# Altium PCB USB-RS485-unit.PcbDoc
Units mm, origin at the board's own origin, x right, y up, seen from the top; angles counter-clockwise.
Board outline 53 x 30 mm, 2 copper layers (Top Layer, Bottom Layer), stack 0.991 mm thick; 21 components, 15 nets, 96 pads, 14 vias.
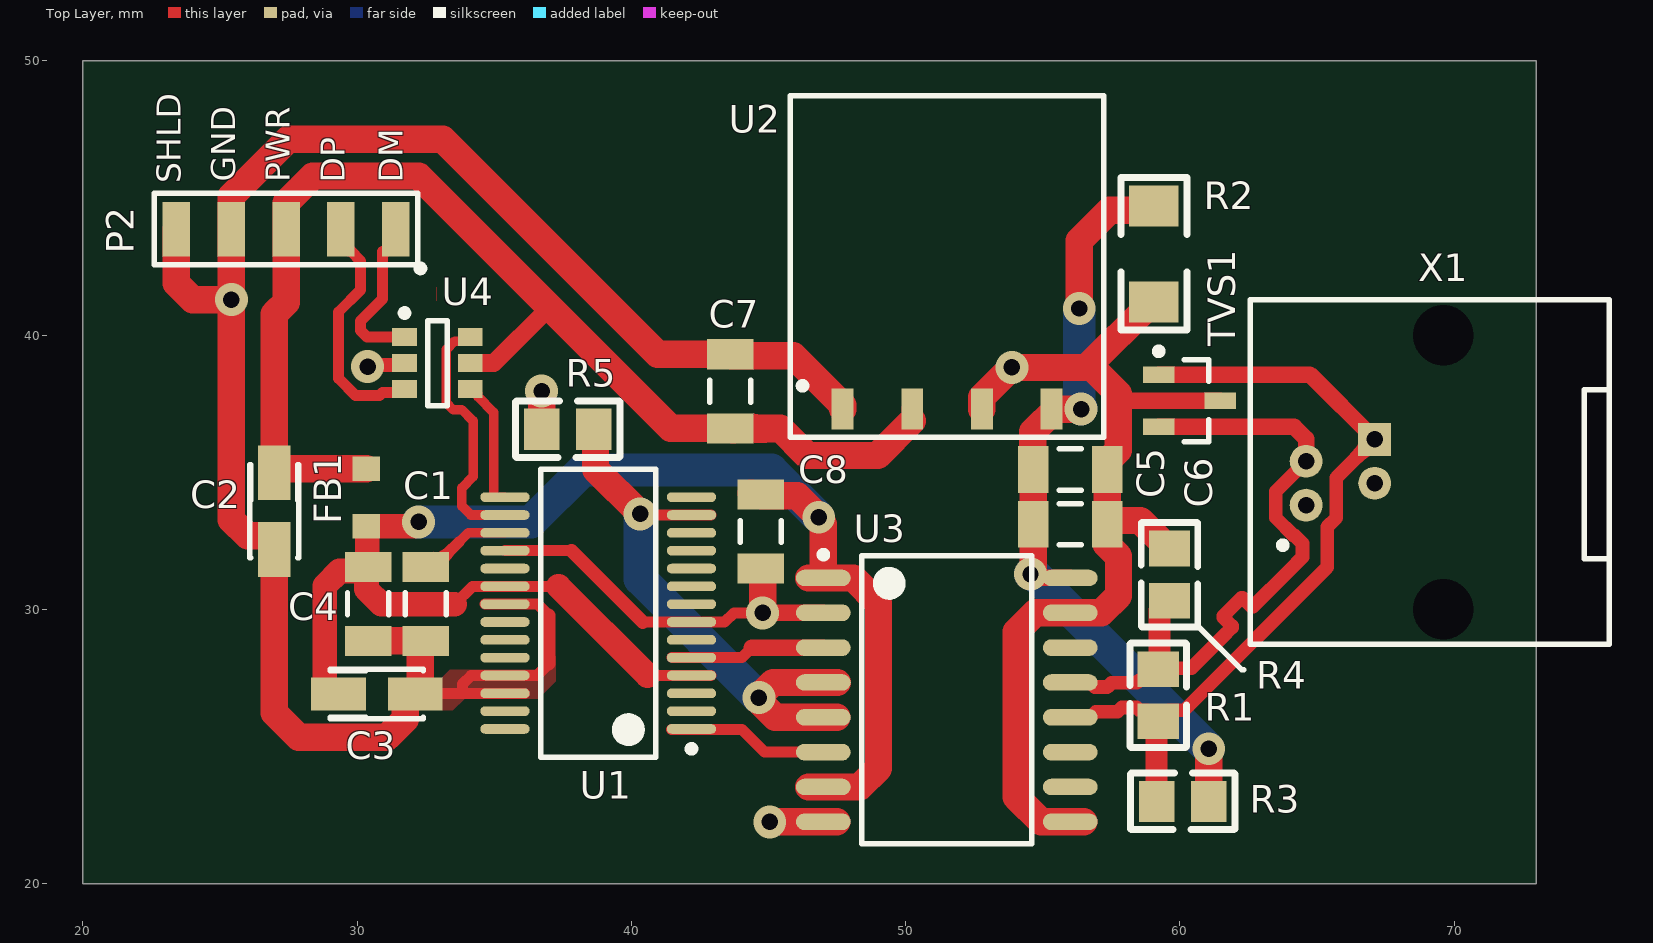
[diagram p0: Top Layer view]
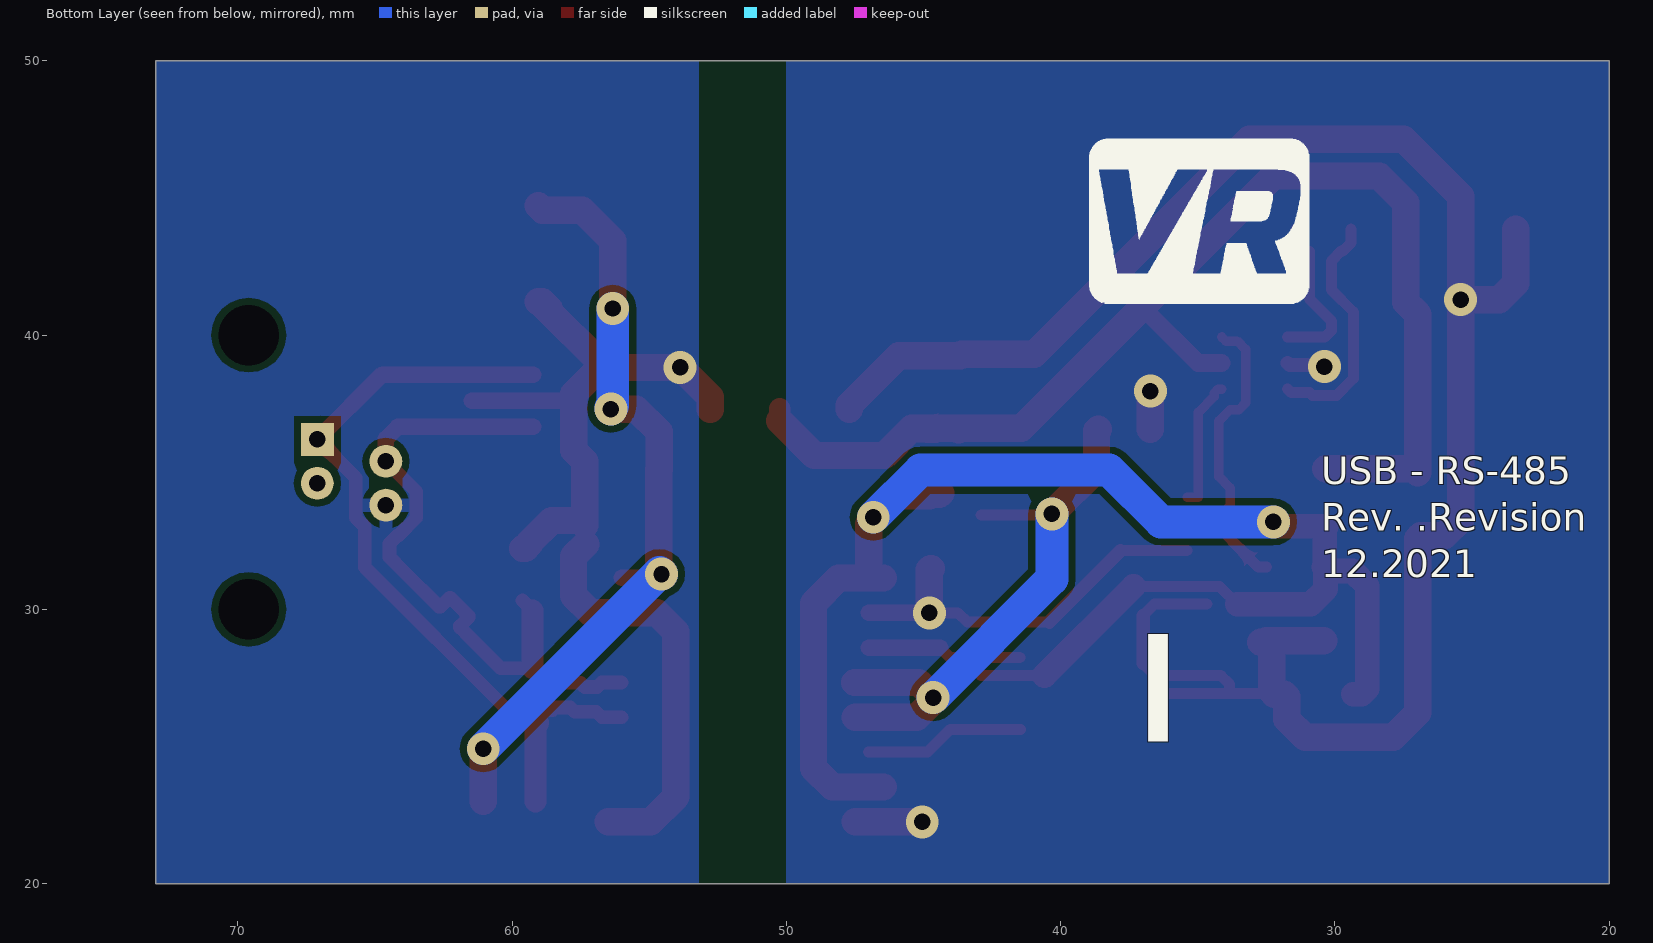
[diagram p1: Bottom Layer view, seen from below]
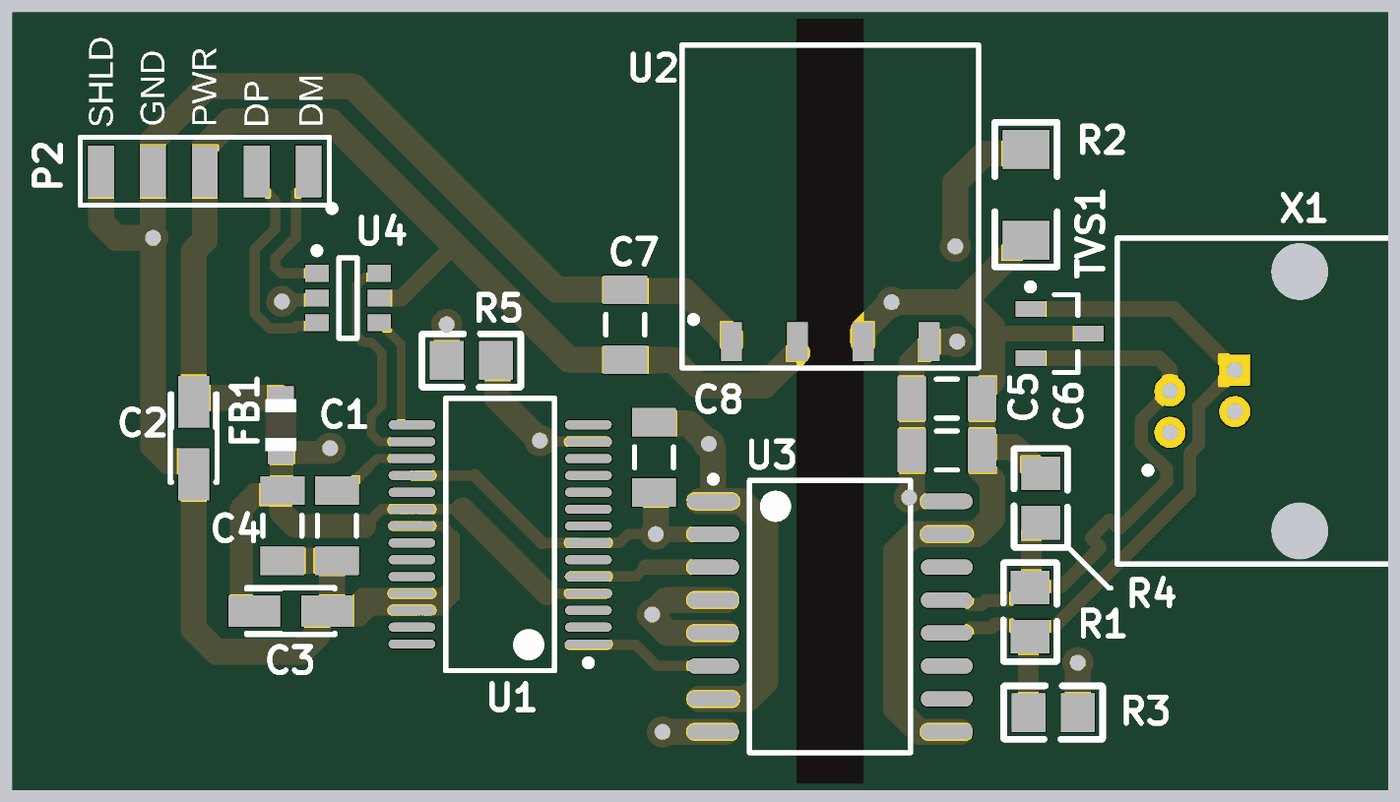
[diagram p2: 3D render of the assembled board from above, using the file's embedded part models]

## Layer stack, top to bottom
Top Solder: solder mask 0.0102, Solder Resist, Dk 3.5
Top Layer: signal copper 0.0356
Dielectric 1: dielectric 0.92, FR-4, Dk 4.8
Bottom Layer: signal copper 0.0356
Bottom Solder: solder mask 0.0102, Solder Resist, Dk 3.5

## Board outline
20,20 20,50 73,50 73,20

## Design rules (kind name [scope] priority, off if disabled: settings)
BoardOutlineClearance [(ObjectKind = 'Component') and not (Name = 'X1')] p1: gap=0.254 ignorepadtopadclearanceinfootprint=FALSE except(0: Arc-SplitContinuation Track-SplitContinuation SMDPad-SplitContinuation THPad-SplitContinuation Via-SplitContinuation Fill-SplitContinuation Poly-SplitContinuation Region-SplitContinuation Text-SplitContinuation)
Clearance Clearance-JLCPCB [All] p1 off: gap=0.254 ignorepadtopadclearanceinfootprint=TRUE except(0: Arc-Hole SMDPad-Hole THPad-Hole Via-Hole Fill-Hole Poly-Hole Region-Hole Text-Hole; 0.127: SMDPad-SMDPad; 0.2: Arc-Arc Arc-Track Arc-SMDPad Track-Track Track-SMDPad; 0.33: Track-Hole)
Clearance Clearance-3class [All] p2: gap=0.25 ignorepadtopadclearanceinfootprint=TRUE
ComponentClearance [All] p1: gap=0.254 collisioncheckmode=3 verticalgap=0.254 showdistances=TRUE
DiffPairsRouting [All] p1: maxlimit=1 minlimit=0.4 mostfreqgap=0.4 toplayer_minwidth=0.2 toplayer_maxwidth=1 toplayer_prefwidth=0.5 bottomlayer_minwidth=0.2 bottomlayer_maxwidth=1 bottomlayer_prefwidth=0.5 maxuncoupledlength=12.7
HoleSize HoleSize-Pad-JLCPCB [IsPad] p1: absolutevalues=TRUE maxlimit=6.35 minlimit=0.2 maxpercent=80.000 minpercent=20.000 // The annular ring size will be enlarged to 0.15mm in production. Plated! Tolerance is +0.13/-0.08mm
HoleSize HoleSize-PTH-JLCPCB [InDrillLayerPair('Top Layer - Bottom Layer')] p2: absolutevalues=TRUE maxlimit=6.35 minlimit=0.2 maxpercent=80.000 minpercent=20.000 // The annular ring size will be enlarged to 0.15mm in production. Plated! Tolerance is +0.13/-0.08mm
HoleSize HoleSize-Via-JLCPCB [IsVia] p3: absolutevalues=TRUE maxlimit=6.35 minlimit=0.3 maxpercent=80.000 minpercent=20.000 // Plated! Tolerance is +0.13/-0.08mm
HoleSize "HoleSize-Mechanical hole-JLCPCB" [InDrillLayerPair('Top Layer - Bottom Layer')] p4: absolutevalues=TRUE maxlimit=6.3 minlimit=0.2 maxpercent=80.000 minpercent=20.000 // Non plated! Tolerance is +-0.2mm
HoleToHoleClearance HoleToHoleClearance-JLCPCB [All] p1: gap=0.5 allowstackedmicrovias=TRUE
MatchedLengths [All] p1 off: tolerance=2 checknetsindiffpair=TRUE checkdiffpairvsdiffpair=FALSE checkxsignals=FALSE checkothers=FALSE
MinimumAnnularRing MinimumAnnularRing-2oz-JLCPCB [All] p1: minimumring=0.2 // 75um
MinimumAnnularRing MinimumAnnularRing-1oz-JLCPCB [All] p2: minimumring=0.13 // 35um
MinimumSolderMaskSliver MinimumSolderMaskSliver-JLCPCB [All] p1: minsoldermaskwidth=0.2
PlaneConnect [All] p1: pad.planeconnectstyle=Relief pad.reliefexpansion=0.6 pad.reliefentries=4 pad.reliefconductorwidth=0.5 pad.reliefairgap=0.4 via.planeconnectstyle=Direct via.reliefexpansion=0.6 via.reliefentries=4 via.reliefconductorwidth=0.5 via.reliefairgap=0.4
PolygonConnect [All] p1: thpad.connectstyle=Relief thpad.reliefconductorwidth=0.5 thpad.reliefentries=4 thpad.polygonreliefangle="90 Angle" thpad.airgapwidth=0.254 smdpad.connectstyle=Relief smdpad.reliefconductorwidth=0.5 smdpad.reliefentries=4 smdpad.polygonreliefangle="90 Angle" smdpad.airgapwidth=0.254 via.connectstyle=Direct via.reliefconductorwidth=0.5 via.reliefentries=4 via.polygonreliefangle="90 Angle" via.airgapwidth=0.254
RoomDefinition Spacer4 [All] p1: confinementstyle=ConfineOut formatcopy=TRUE lockcomponents=FALSE outline 69,22 ccw(c71,22) 71,20 ccw(c71,22) 73,22 ccw(c71,22) 71,24 ccw(c71,22)
RoomDefinition Spacer3 [All] p2: confinementstyle=ConfineOut formatcopy=TRUE lockcomponents=FALSE outline 69,48 ccw(c71,48) 71,46 ccw(c71,48) 73,48 ccw(c71,48) 71,50 ccw(c71,48)
RoomDefinition Spacer2 [All] p3: confinementstyle=ConfineOut formatcopy=TRUE lockcomponents=FALSE outline 22,46 cw(c22,48) 20,48 cw(c22,48) 22,50 cw(c22,48) 24,48 cw(c22,48)
RoomDefinition Spacer1 [All] p4: confinementstyle=ConfineOut formatcopy=TRUE lockcomponents=FALSE outline 22,20 cw(c22,22) 20,22 cw(c22,22) 22,24 cw(c22,22) 24,22 cw(c22,22)
RoomDefinition USB-RS485-unit_1 [InComponentClass('USB-RS485-unit')] p5: confinementstyle=ConfineOut formatcopy=TRUE lockcomponents=FALSE outline 20,20 73,20 73,21 20,21
RoomDefinition USB-RS485-unit [InComponentClass('USB-RS485-unit')] p6: confinementstyle=ConfineOut formatcopy=TRUE lockcomponents=FALSE outline 19.98,49 73.01,49 73.01,50 19.98,50
RoutingVias RoutingVias-JLCPCB [All] p1: holewidth=0.6 width=1.2 viastyle="Through Hole" minholewidth=0.3 minwidth=0.6 maxholewidth=6.35 maxwidth=6
SilkToSolderMaskClearance SilkToSolderMaskClearance-JLCPCB [IsPad] p1: minsilkscreentomaskgap=0.15 clearancetoexposedcopper=TRUE
SolderMaskExpansion SolderMaskExpansion-JLCPCB [All] p1: expansion=0.05
Width Width-1oz-JLCPCB [All] p1: maxlimit=3 minlimit=0.127 preferedwidth=0.5
Width Width-2oz-JLCPCB [All] p2 off: maxlimit=3 minlimit=0.2 preferedwidth=0.3
23 further rules are at their usual default settings.

## Classes and differential pairs
differential pair class 3: IN
differential pair class 2: USB1
differential pair class 1: USB
differential pair IN: +IN_P -IN_N
differential pair USB1: +USB1_P -USB1_N
differential pair USB: +USB_P -USB_N

## Components (designator, comment, footprint, x,y, rotation, side; value= is the part's Value field where it differs from the comment)
C1 "0.1uF" C1206 32.5,30.2 r90 top
C2 "0.1uF" TC3216-1206 26.98,33.58 r270 top
C3 "4.7uF" TC3216-1206 30.72,26.91 r0 top
C4 "0.1uF" C1206 30.4,30.2 r90 top
C5 "10uF" C1206 56,35.1 r180 top
C6 "0.1uF" C1206 56,33.1 r180 top
C7 "0.1uF" C1206 44.72,32.84 r90 top
C8 "4.7uF" C1206 43.61,37.95 r270 top
FB1 "40Ohm, 1.5A" "WE-CBF_0805_High Speed" 30.34,34.08 r270 top
P2 "USB pads" "USB SOLDERING PADS" 31.41,43.86 r180 top value="USB Pads"
R1 "120" RES-0805 59.21,26.87 r90 top
R2 "330" RES-1206 59.05,42.96 r90 top
R3 "560" RES-0805 60.1,23 r0 top
R4 "560" RES-0805 59.62,31.27 r270 top
R5 "10k" RES-0805 37.68,36.57 r0 top
TVS1 "CDSOT23-SM712" SOT-23B_N 60.35,37.61 r0 top
U1 "FT232RL-Reel" SSOP-28_L 38.79,29.865 r180 top locked
U2 "B0505S" "B0505S - HORIZONTAL" 47.7,37.3 r0 top locked
U3 "ADM2483" "SOL-16 WIDE" 51.5,26.7 r0 top locked
U4 "USBLC6-2" SOT23-6 32.93,38.98 r0 top
X1 "RJ11" RJ11 64.6,33.8 r90 top

## Footprints (in the part's own frame and the unit in brackets; to place one, negate y for a bottom-side part, rotate by r counter-clockwise, add the part's x,y. Pads: shape width x height; smd on the part's side, far side on the other; paste and mask are expansions set on the pad)
"B0505S - HORIZONTAL" [mm] "Isolated DC-DC"
  rect 0.8x1.5 smd: 1(0,0) 2(2.54,0) 3(5.08,0) 4(7.62,0)
  silkscreen extent -1.91,-1.02 9.53,11.43, body extent -1.94,-0.27 9.56,11.4, height 6.01
C1206 [mm] "Chip Capacitor, Body 3.2x1.6mm, IPC High Density"
  rect 1.1x1.7 smd: 1(-1.35,0) 2(1.35,0)
  silkscreen extent -0.4,-0.75 0.4,0.75, body extent -1.6,-0.8 1.6,0.82, height 1.64
RES-0805 [mm] "Chip Resistor; Body 2 x 1.3 mm (LxW typ)"
  rect 1.3x1.5 smd: 1(-0.95,0) 2(0.95,0)
  silkscreen extent -1.91,-1.03 1.91,1.03, body extent -1.24,-0.65 1.29,0.6, height 0.51
RES-1206 [mm] "Chip Resistor; Body  x mm (LxW typ)"
  rect 1.5x1.8 smd: 1(-1.75,0) 2(1.75,0)
  silkscreen extent -2.78,-1.2 2.79,1.2, body extent -1.9,-0.8 1.9,0.8, height 0.61
RJ11 [mm] "Connector"
  rect 1.2x1.2 hole 0.6: 1(2.4,-2.5)
  round 1.2 hole 0.6: 2(1.6,0) 3(0.8,-2.5) 4(0,0)
  round 0 hole 2.2 unplated: 5(-3.8,-5) 5(6.2,-5)
  silkscreen extent -5.08,-11.05 7.49,2.03, body extent -5.11,-11 7.51,2, height 14.61
"SOL-16 WIDE" [mm] "16-Pin Small Outline Integrated Circuit 1.27 mm Pitch, Wide Body"
  oval 2x0.6 smd: 1(-4.5,4.445) 2(-4.5,3.175) 3(-4.5,1.905) 4(-4.5,0.635) 5(-4.5,-0.635) 6(-4.5,-1.905) 7(-4.5,-3.175) 8(-4.5,-4.445) 9(4.5,-4.445) 10(4.5,-3.175) 11(4.5,-1.905) 12(4.5,-0.635) 13(4.5,0.635) 14(4.5,1.905) 15(4.5,3.175) 16(4.5,4.445)
  silkscreen extent -4.62,-5.25 3.1,5.42, body extent -5.11,-5.15 5.21,5.15, height 2.66
SOT23-6 [mm] "SOT23, 5-Leads, Body 2.9x1.6mm, Pitch 0.95mm, Lead Span 2.8mm, IPC High Density"
  rect 0.9x0.65 smd: 1(-1.2,0.95) 2(-1.2,0) 3(-1.2,-0.951) 4(1.2,-0.951) 5(1.2,0) 6(1.2,0.95)
  silkscreen extent -1.32,-1.55 0.35,1.95, body extent -1.2,-1.45 1.19,1.45, height 1
SOT-23B_N [mm] "SOT23, 3-Leads, Body 2.9x1.3mm, Pitch 0.95mm, Lead Span 2.4mm, IPC Medium Density"
  rect 1.15x0.6 smd: 1(-1.125,0.95) 2(-1.125,-0.95) 3(1.125,0)
  silkscreen extent -1.25,-1.5 0.7,1.92, body extent -1.14,-1.45 1.19,1.45, height 1
SSOP-28_L [mm] "SOP, 28-Leads, Body 10.2x5.3mm, Pitch 0.65mm, IPC High Density"
  oval 1.8x0.35 smd: 1(-3.4,4.225) 2(-3.4,3.575) 3(-3.4,2.925) 4(-3.4,2.275) 5(-3.4,1.625) 6(-3.4,0.975) 7(-3.4,0.325) 8(-3.4,-0.325) 9(-3.4,-0.975) 10(-3.4,-1.625) 11(-3.4,-2.275) 12(-3.4,-2.925) 13(-3.4,-3.575) 14(-3.4,-4.225) 15(3.4,-4.225) 16(3.4,-3.575) 17(3.4,-2.925) 18(3.4,-2.275) 19(3.4,-1.625) 20(3.4,-0.975) 21(3.4,-0.325) 22(3.4,0.325) 23(3.4,0.975) 24(3.4,1.625) 25(3.4,2.275) 26(3.4,2.925) 27(3.4,3.575) 28(3.4,4.225)
  silkscreen extent -3.52,-5.25 2.1,5.25, body extent -3.91,-5.1 3.91,5.1, height 1.97
TC3216-1206 [mm] "Capacitor, SM Tantalum; Body 3.2 x 1.6 mm (LxW typ)"
  rect 2x1.2 smd: 1(-1.4,0) 2(1.4,0)
  silkscreen extent -1.7,-0.9 1.7,0.9, body extent -1.7,-0.95 1.7,0.95, height 1.84
"USB SOLDERING PADS" [mm] "Isolated DC-DC"
  rect 1x2 smd: 1(0,0) 2(2,0) 3(4,0) 4(6,0) 5(8,0)
  silkscreen extent -1.03,-1.32 8.8,1.55
"WE-CBF_0805_High Speed" [mm] "SMD EMI Suppression Ferrite  Bead, body 2x1.2mm"
  rect 0.9x1 smd: 1(-1.05,0) 2(1.05,0)
  body extent -1,-0.6 1,0.6, height 0.9

## Part data
C1 C4 C6 C7: library part Cap, "Capacitor ceramic SMT", Manufacturer=Murata, Manufacturer_Part_Number=GRM319R72A104KA01D, Order_Code_ChipIDip=9000697437, Part_Type="Chip Capacitor"
C2: library part "Cap Polarized", "Polarized Capacitor SMT", Manufacturer=TECAP, Manufacturer_Part_Number=TECAP0.1/35VA10, Voltage=35, Order_Code_ChipIDip=1654, Part_Type="Polarized Capacitor"
C3: library part "Cap Polarized", "Polarized Capacitor SMT", Manufacturer=TECAP, Manufacturer_Part_Number=TECAP4.7/10VA10, Order_Code_ChipIDip=6038, Part_Type="Polarized Capacitor"
C5: library part Cap, "Capacitor ceramic SMT", Manufacturer=Murata, Manufacturer_Part_Number=GRM31CR61E106KA12L, Order_Code_ChipIDip=9000122641, Part_Type="Chip Capacitor"
C8: library part Cap, "Capacitor ceramic SMT", Manufacturer=Murata, Manufacturer_Part_Number=GRM31CR71E475KA88L, Order_Code_ChipIDip=9000122604, Part_Type="Chip Capacitor"
FB1: library part 7427920, "Ferrite Bead", DC Resistance max.=0.15Ohm, Manufacturer="Laird Technologies", Manufacturer_Part_Number=MI0805K400R-10, Operating Temperature="-55 to +125degC", Rated Current=1.5A, Impedance @100MHz=40Ohm, Impedance max.=40Ohm, Manufacturer Part Number=MI0805K400R-10, Mounting Technology=SMT, Order_Code_ChipIDip=9000618736, Packaging="Tape and Reel", Size=0805
P2: "Pads for soldering USB cable", Part_Type=Mechanical
R1: library part Res, "Rectangular Thick Film Chip Resistor", Manufacturer=Yageo, Manufacturer_Part_Number=RC0805FR-07120RL, ComponentLink1Description="Manufacturer Link", ComponentLink1URL=http://www.panasonic.com/industrial/components/resistive_products.htm, ComponentLink2Description=Datasheet, ComponentLink2URL=http://www.panasonic.com/industrial/components/pdf/AOA0000CE8.pdf, Order_Code_ChipIDip=9000079464, Part_Type=Resistor
R2: library part Res, "Rectangular Thick Film Chip Resistor", Manufacturer=Yageo, Manufacturer_Part_Number=RC0805FR-07330RL, ComponentLink1Description="Manufacturer Link", ComponentLink1URL=http://www.panasonic.com/industrial/components/resistive_products.htm, ComponentLink2Description=Datasheet, ComponentLink2URL=http://www.panasonic.com/industrial/components/pdf/AOA0000CE8.pdf, Order_Code_ChipIDip=9000079474, Part_Type=Resistor
R3 R4: library part Res, "Rectangular Thick Film Chip Resistor", Manufacturer=Yageo, Manufacturer_Part_Number=RC0805FR-07560RL, ComponentLink1Description="Manufacturer Link", ComponentLink1URL=http://www.panasonic.com/industrial/components/resistive_products.htm, ComponentLink2Description=Datasheet, ComponentLink2URL=http://www.panasonic.com/industrial/components/pdf/AOA0000CE8.pdf, Order_Code_ChipIDip=9000079480, Part_Type=Resistor
R5: library part Res, "Rectangular Thick Film Chip Resistor", Manufacturer=Yageo, Manufacturer_Part_Number=RC0805FR-0710KL, ComponentLink1Description="Manufacturer Link", ComponentLink1URL=http://www.panasonic.com/industrial/components/resistive_products.htm, ComponentLink2Description=Datasheet, ComponentLink2URL=http://www.panasonic.com/industrial/components/pdf/AOA0000CE8.pdf, Order_Code_ChipIDip=9000079514, Part_Type=Resistor
TVS1: "Surface Mount TVS Diode", Manufacturer=Bourns, Package=SOT-23, ComponentLink1Description=Datasheet, ComponentLink1URL=http://tunmcdsvn.tun.st.com/Component_Datasheet_Library/Trunk/Diodes/STM_ESD_ESDA6V1BC6, Manufacturer_Part_Number=CDSOT23-SM712, Order_Code_ChipIDip=9000168919, Part_Type=TVS
U1: "USB UART Asynchronous Serial Data Transfer Chip, SSOP-28, Tape and Reel", Manufacturer=FTDI, ComponentLink1Description="Manufacturer Link", ComponentLink1URL=http://www.ftdichip.com/Products/ICs/FT232R.htm, ComponentLink2Description=Datasheet, ComponentLink2URL=http://www.ftdichip.com/Support/Documents/DataSheets/ICs/DS_FT232R.pdf, Manufacturer_Part_Number=FT232RL-Reel, Order_Code_ChipIDip=201330607, Part_Type=Driver
U2: "Isolated DC-DC Converter", Manufacturer="Mornsun Power", Manufacturer_Part_Number=B0505S-1WR2, Package=SIP, ComponentLink1Description=Datasheet, ComponentLink1URL=http://tunmcdsvn.tun.st.com/Component_Datasheet_Library/Trunk/Diodes/STM_ESD_ESDA6V1BC6, Order_Code_ChipIDip=9000304516, Part_Type=DC-DC
U3: "Half-Duplex, Isolated RS-485 Transceiver", Manufacturer=STMICROELECTRONICS, Manufacturer_Part_Number=ADM2483BRWZ-REEL, Package=SOIC-W, ComponentLink1Description=Datasheet, ComponentLink1URL=http://tunmcdsvn.tun.st.com/Component_Datasheet_Library/Trunk/Diodes/STM_ESD_ESDA6V1BC6, Order_Code_ChipIDip=9000375326, Part_Type=Transceiver
U4: "Quad Bidir ESD protection", Manufacturer=STMICROELECTRONICS, Manufacturer_Part_Number=USBLC6-2SC6, ComponentLink1Description=Datasheet, ComponentLink1URL=http://tunmcdsvn.tun.st.com/Component_Datasheet_Library/Trunk/Diodes/STM_ESD_ESDA6V1BC6, Order_Code_ChipIDip=9000039051, Part_Type="ESD Protection", Status=Released
X1: "RJ-11 Connector, 4-Pin", Manufacturer=Connfly, Manufacturer_Part_Number=DS1132-S40BPX, Order_Code_ChipIDip=9000190984, Part_Type=Connector

## Via types
v1: diameter 1.2, hole 0.6, Top Layer to Bottom Layer, tented both sides, 14 vias

## Nets (pads, with @x,y where several pads share a name; then routed paths per layer and width w, separated by ;. In a path a pad name is that pad's centre, name@x,y a point inside that pad or via, vN(x,y) a via of type N, cw(c..) or ccw(c..) an arc to the next point about the centre after c; other vN are vias at no path point)
+5: C2.1 C8.2 FB1.1 P2.3 U2.2 U4.5 | length 45.5
  Top Layer w0.65: U4.5 34.98,38.98 36.91,40.91
  Top Layer w0.8: U2.2@50.24,36.87 U2.2
  Top Layer w1: C2.1 C2.1@26.98,35.03 ; FB1.1 27.08,35.13 C2.1@26.98,35.03 ; C8.2@43.721,36.55 C8.2@43.671,36.6 ; U2.2@50.24,36.87 48.98,35.61 46.42,35.61 45.43,36.6 C8.2@43.671,36.6 ; C2.1@26.98,35.03 26.98,40.77 27.41,41.2 P2.3 27.41,44.82 28.39,45.8 32.24,45.8 41.44,36.6 C8.2 C8.2@43.671,36.6
GND: C1.1 C2.2 C3.2 C4.1 C7.1 C8.1 P2.4 P2.5 R5.1 U1.7 U1.18 U1.21 U1.25 U1.26 U2.1 U3.2 U3.8 U4.2 | length 93.8
  Top Layer w0.4: C3.2@32.74,26.94 33.85,26.94 ; U1.21@34.67,30.19 U1.21 36.575,30.19 36.99,29.775 ; U1.18 37.815,32.14 ; U1.26@36.1,26.94 U1.26 33.85,26.94 ; 36.99,28.025 36.555,27.59 U1.25 34.16,27.59 33.85,27.28 33.85,26.94 ; 40.415,29.54 U1.7 43.4,29.54 43.735,29.875 v1(44.787,29.875)
  Top Layer w0.5: v1(30.38,38.85) 30.44,38.91 31.124,38.91 31.66,38.91 U4.2 ; 36.99,28.025 36.99,29.775 ; 37.815,32.14 40.415,29.54
  Top Layer w0.6: v1(44.787,29.875) U3.2 ; v1@45,22.3 v1(45.045,22.255)
  Top Layer w1: P2.5 23.41,41.89 24.005,41.295 v1(25.415,41.295) ; C4.1 C1.1 ; C1.1@32.7,28.8 32.31,28.8 32.31,27.01 32.21,26.91 C3.2 31.849,26.91 31.749,26.81 31.749,25.999 31.09,25.34 27.87,25.34 26.98,26.23 C2.2 26.98,32.58 26.88,32.68 26.01,32.68 25.415,33.275 v1(25.415,41.295) ; R5.1 v1(36.73,37.96) ; C7.1 44.737,31.49 44.787,31.44 v1(44.787,29.875) ; v1(45.045,22.255) U3.8 U3.8@47.49,22.255 ; U2.1 47.7,37.45 45.9,39.25 43.66,39.25 C8.1 40.968,39.3 33.128,47.14 27.49,47.14 25.41,45.06 P2.4 25.41,41.3 v1(25.415,41.295)
GNDA: C5.1 C6.1 R2.1 R4.1 TVS1.3 U2.3 U3.9 U3.15 X1.4 | length 36.8
  Top Layer w0.6: 57.75,37.859 57.999,37.61 TVS1.3
  Top Layer w1: U2.3 52.78,37.73 v1(53.87,38.82) 56.61,38.82 ; U3.9@56.5,22.255 U3.9 54.945,22.255 54.04,23.16 54.04,29.19 54.725,29.875 U3.15 57.135,29.875 57.76,30.5 57.76,31.93 C6.1@57.32,32.37 ; R2.1@58.65,40.96 58.9,41.21 R2.1 ; R2.1@58.95,41.16 56.61,38.82 ; R4.1 59.52,32.22 59.37,32.37 59.37,32.427 58.557,33.24 57.527,33.24 57.35,33.063 C6.1 C5.1 57.35,35.4 57.75,35.8 57.75,37.859 56.789,38.82 56.61,38.82
IN_N: R1.2 R4.2 TVS1.2 U3.13 X1.2 | length 24.9
  Top Layer w0.5: U3.13 56.727,27.335 56.896,27.166 57.354,27.166 57.507,27.32 58.417,27.32 58.517,27.42 58.81,27.42 R1.2 R1.2@59.247,27.857 ; R1.2@59.26,27.87 R1.2@59.247,27.857 ; R4.2@59.26,29.96 R4.2 ; X1.2 63.496,34.296 63.496,33.343 64.143,32.696 64.175,32.696 64.468,32.403 64.468,31.905 63.986,31.424 62.669,30.106 cw(c62.634,30.141) 62.598,30.106 62.298,30.406 ccw(c62.262,30.371) 62.227,30.406 61.591,29.77 ccw(c61.626,29.735) 61.591,29.699 61.891,29.399 cw(c61.856,29.363) 61.891,29.328 61.573,29.01 60.42,27.857 R1.2@59.247,27.857
  Top Layer w0.6: TVS1.2 64.16,36.66 64.6,36.22 X1.2
  Top Layer w0.8: R1.2@59.26,27.87 R4.2@59.26,29.96
  Bottom Layer w1: X1.2 X1.2@64.638,35.438
IN_P: R1.1 R3.1 TVS1.1 U3.12 X1.1 | length 29.4
  Top Layer w0.5: U3.12 56.727,26.065 56.928,26.266 57.726,26.266 57.88,26.42 58.417,26.42 58.517,26.32 58.81,26.32 R1.1 59.61,26.32 60.156,26.32 65.368,31.532 65.368,33.006 65.704,33.343 65.704,34.804 X1.1
  Top Layer w0.6: TVS1.1 64.74,38.56 X1.1
  Top Layer w0.8: R3.1 R1.1@59.15,25.86
  Top Layer w1: R1.1@59.15,25.86 R1.1
  Bottom Layer w1: X1.1@67,36.3 X1.1
NetC1_2: C1.2 U1.17 | length 3.4
  Top Layer w0.35: 33.74,32.48 34.05,32.79 U1.17
  Top Layer w0.4: C1.2 32.8,31.55 33.73,32.48 33.74,32.48
NetR5_2: R5.2 U1.13 U3.4 U3.5 | length 21.3
  Top Layer w0.4: v1@40.36,33.44 U1.13 U1.13@42.9,33.44
  Top Layer w0.5: v1(40.32,33.48) v1@40.36,33.44
  Top Layer w1: R5.2 38.691,36.509 38.691,35.109 v1(40.32,33.48) ; U3.5@47.49,26.065 U3.5 45.245,26.065 44.59,26.72 44.575,26.735 45.175,27.335 U3.4 U3.4@47.51,27.335
  Bottom Layer w1.2: v1(40.32,33.48) 40.32,31.11 v1(44.65,26.78)
RXD: U1.5 U3.3 | length 5.7
  Top Layer w0.4: U1.5@41.48,28.24 U1.5 44.03,28.24 44.395,28.605
  Top Layer w0.6: 44.395,28.605 U3.3
TXD: U1.1 U3.6 | length 5.9
  Top Layer w0.4: U1.1@41.47,25.615 44.026,25.615 44.846,24.795 U3.6
USB1_N: P2.1 U4.1 | length 6.1
  Top Layer w0.4: P2.1@30.927,43.04 P2.1@30.927,42.943 ; P2.1 31.41,43.36 31.11,43.06 31.044,43.06 P2.1@30.927,42.943 ; U4.1 30.364,39.93 30.13,40.164 30.13,40.519 30.927,41.316 P2.1@30.927,42.943
USB1_P: P2.2 U4.3 | length 8.9
  Top Layer w0.4: P2.2 29.41,43.36 29.71,43.06 29.776,43.06 30.127,42.709 30.127,41.648 29.33,40.851 29.33,38.415 29.945,37.8 30.815,37.8 30.919,37.904 31.605,37.904 U4.3
USB_N: U1.16 U4.6 | length 9.2
  Top Layer w0.35: U4.6 33.98,39.78 33.554,39.78 33.255,39.481 33.255,37.528 33.504,37.279 33.819,37.279 34.23,36.868 34.23,34.84 33.82,34.43 33.82,33.767 34.147,33.44 U1.16
USB_P: U1.15 U4.4 | length 4.8
  Top Layer w0.35: U4.4 34.255,38.029 34.405,37.879 34.405,37.754 34.98,37.179 34.98,34.09 U1.15
VCC: C3.1 C4.2 C7.2 FB1.2 U1.4 U1.20 U3.1 U3.7 | length 57.2
  Top Layer w0.4: 33.56,30.19 34.21,30.84 U1.20 37.34,30.84 ; 40.59,27.59 U1.4 U1.4@42.91,27.59
  Top Layer w0.9: C3.1 29.02,26.91 28.82,27.11 28.82,30.86 29.36,31.4 30.25,31.4 C4.2@30.34,31.49 ; v1(32.24,33.19) 32.08,33.03 FB1.2 30.315,33.005 30.345,33.005 30.37,32.98 30.37,31.58 C4.2 C4.2@30.34,31.49 ; 33.56,30.19 30.89,30.19 30.34,30.74 C4.2@30.34,31.49 ; 37.34,30.84 40.59,27.59
  Top Layer w1: C7.2@44.37,34.24 C7.2@44.42,34.19 ; C7.2 44.77,34.14 46.05,34.14 v1(46.83,33.36) ; U3.7@46.46,23.525 U3.7 48.325,23.525 49.01,24.21 49.01,30.22 48.085,31.145 U3.1 ; U3.1@46.47,31.145 U3.1 ; v1@47,33.11 U3.1
  Bottom Layer w1.2: v1(32.24,33.19) 36.34,33.19 38.23,35.08 45.11,35.08 v1(46.83,33.36)
VCCA: C5.2 C6.2 R2.2 R3.2 U2.4 U3.16 | length 29.6
  Top Layer w0.6: v1@54.41,31.43 54.695,31.145 U3.16
  Top Layer w1: v1(54.553,31.288) 54.553,31.342 54.65,31.439 C6.2 C5.2 54.64,35.11 54.64,36.47 55.47,37.3 v1(56.4,37.3) ; v1(56.33,40.97) 56.33,43.44 57.439,44.549 58.889,44.549 R2.2 ; R3.2 v1(61.05,24.92)
  Bottom Layer w1.2: v1(54.553,31.288) 54.578,31.288 54.63,31.34 v1(61.05,24.92) ; v1(56.33,40.97) 56.33,37.424 56.4,37.354 v1(56.4,37.3)
pads on no net: U1.2 U1.3 U1.6 U1.8 U1.9 U1.10 U1.11 U1.12 U1.14 U1.19 U1.22 U1.23 U1.24 U1.27 U1.28 U3.10 U3.11 U3.14 X1.3 X1.5

## Polygon pours and split planes (outlines as drawn)
no net on Top Solder "isolation" (solid, pour order 0): 50.2,52 52.8,52 52.8,18.4 50.2,18.4
no net on Bottom Solder "isolation2" (solid): 50.3,50.7 52.9,50.7 52.9,17.1 50.3,17.1
GND on Bottom Layer "GND-D" (solid, pour order 6): 20,20 20,50 50,50 50,20
GNDA on Bottom Layer "GND-A" (solid, remove dead copper, pour order 2): 53.2,20 73,20 73,50 53.2,50
GND on Top Layer "GND_L01_P008" (solid, pour order 8): 33.495,26.315 33.92,26.74 36.6,26.74 37.24,27.38 37.24,28.318 36.75,28.318 36.75,28.06 36.49,27.8 33.38,27.8 33.08,27.5 33.08,26.315

## Silkscreen, mask and mechanical layers (free items; w line width, h text height)
Top Overlay:
  lines w0.2: 60.65,29.395 62.245,27.8 62.32,27.8
  text "GND" at 25.85,45.6 h1.5 r90
  text "PWR" at 27.84,45.58 h1.5 r90
  text "SHLD" at 23.86,45.54 h1.5 r90
  text "DP" at 29.85,45.55 h1.5 r90
  text "DM" at 31.95,45.56 h1.5 r90
Bottom Overlay:
  drawing of 2 lines, arcs and shapes, not listed
  text "USB - RS-485 / Rev. .Revision / 12.2021" at 30.5,30.84 h1.7
  text "I" at 37.52,23.27 h10
M1-Board Shape:
  circle w0.2: c71,22 r2
  lines w0.2: 20,20 73,20 73,50 20,50 20,20
M7-Top Info:
  lines w0.2: 17.6,35.1 71.9,35.1

## Dimensions
71.9,35.1 to 75.599,41.393 on M2-Board Dimensions
73,50 to 75.599,41.393 on M2-Board Dimensions
73,50 to 73,20 on M2-Board Dimensions
20,50 to 73,50 on M2-Board Dimensions